# Altium PCB Power.PcbDoc
Units mil, origin at the board's own origin, x right, y up, seen from the top; angles counter-clockwise.
Board outline 1220.47 x 1511.81 mil, 2 copper layers (Top Layer, Bottom Layer), stack 21 mil thick; 58 components, 52 nets, 202 pads, 195 vias.
Unrouted connection lines stored in the file: 46.
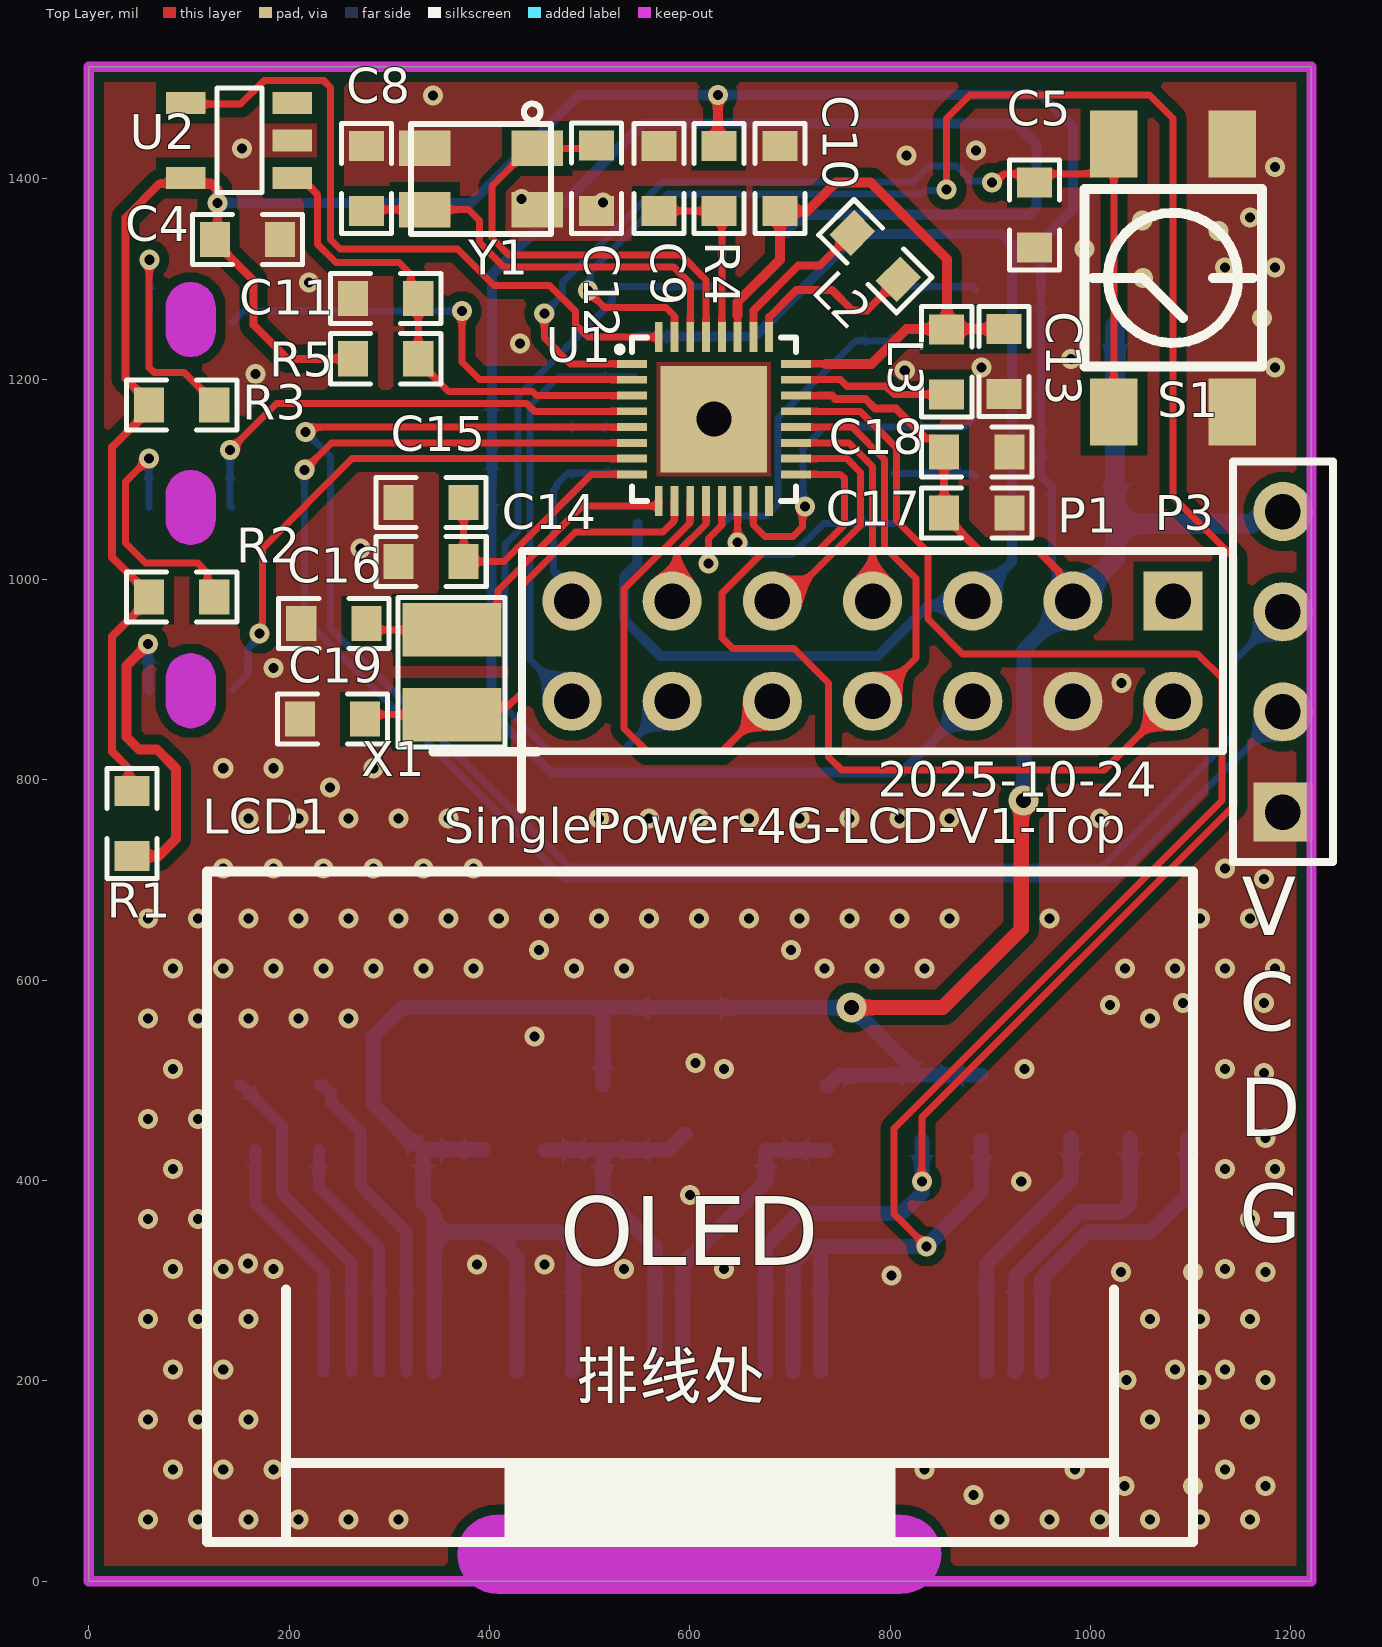
[diagram p0: Top Layer view]
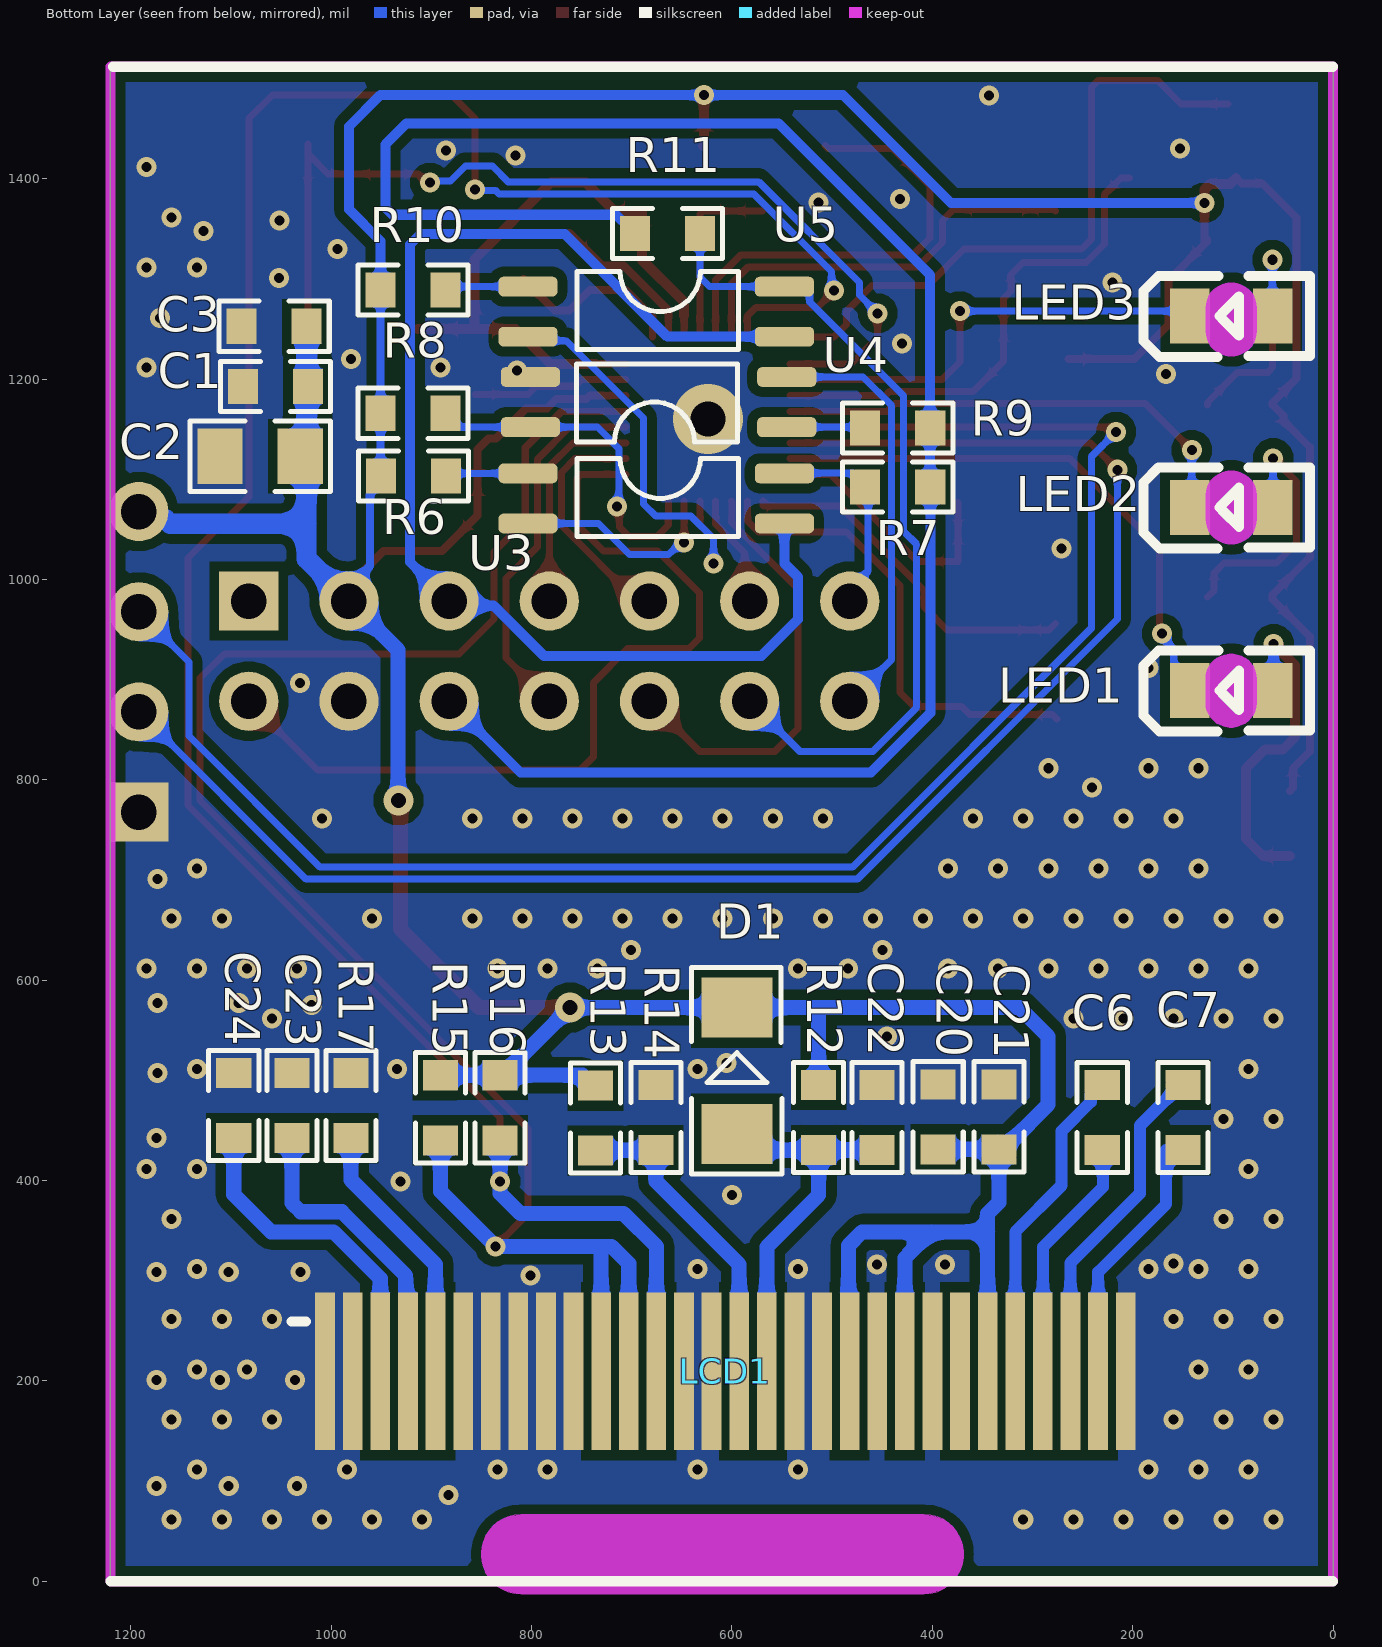
[diagram p1: Bottom Layer view, seen from below]

## Layer stack, top to bottom
Top Solder: solder mask 0.4, Solder Resist, Dk 3.5
Top Layer: signal copper 1.4
Dielectric 2: prepreg 2.8, Composite dielectric, Dk 4.1
Dielectric 1: prepreg 12.6, Composite dielectric, Dk 4.1
Dielectric 3: prepreg 2.8, Composite dielectric, Dk 4.1
Bottom Layer: signal copper 1.4
Bottom Solder: solder mask 0.4, Solder Resist, Dk 3.5

## Board outline
0,0 0,1511.81 1220.47,1511.81 1220.47,0
cut-out: 76.78,877.14 ccw(c101.8,877.14) 126.81,877.14 126.81,900.77 ccw(c101.8,900.77) 76.78,900.77
cut-out: 76.62,1060.16 ccw(c101.63,1060.16) 126.65,1060.16 126.65,1083.79 ccw(c101.63,1083.79) 76.62,1083.79
cut-out: 76.62,1247.71 ccw(c101.63,1247.71) 126.65,1247.71 126.65,1271.34 ccw(c101.63,1271.34) 76.62,1271.34
cut-out: 408,-12.39 cw(c408,27) 408,66.39 811,66.39 cw(c811,27) 850.39,27 cw(c811,27) 811,-12.39

## Design rules (kind name [scope] priority, off if disabled: settings)
Clearance "Via to pad" [IsVia vs IsPad] p1: gap=10 ignorepadtopadclearanceinfootprint=FALSE
Clearance Ploy [InPoly] p2: gap=10 ignorepadtopadclearanceinfootprint=FALSE
Clearance "Track to pad" [IsTrack vs IsPad] p3: gap=8 ignorepadtopadclearanceinfootprint=FALSE
Clearance "Track to track" [IsTrack vs IsTrack] p4: gap=5 ignorepadtopadclearanceinfootprint=FALSE
Clearance "Via to Track" [IsVia vs IsTrack] p5: gap=10 ignorepadtopadclearanceinfootprint=FALSE
Clearance "Via To Via" [IsVia vs IsVia] p6: gap=10 ignorepadtopadclearanceinfootprint=FALSE
ComponentClearance [All] p1: gap=0 collisioncheckmode=3 verticalgap=0 showdistances=FALSE
DiffPairsRouting [All] p1: maxlimit=10 minlimit=7 mostfreqgap=7 toplayer_minwidth=5 toplayer_maxwidth=100 toplayer_prefwidth=7 bottomlayer_minwidth=5 bottomlayer_maxwidth=100 bottomlayer_prefwidth=7 maxuncoupledlength=500
HoleSize [All] p1: absolutevalues=TRUE maxlimit=200 minlimit=1 maxpercent=80.000 minpercent=20.000
HoleToHoleClearance [All] p1: gap=5 allowstackedmicrovias=TRUE
MinimumSolderMaskSliver [All] p1: minsoldermaskwidth=0
PolygonConnect [All vs (InPadClass('All Pads'))] p1: connectstyle=Direct reliefconductorwidth=10 reliefentries=4 polygonreliefangle="90 Angle" airgapwidth=10
PolygonConnect GND焊盘 [InNet('GND_1') vs (InPadClass('All Pads'))] p2: connectstyle=Relief reliefconductorwidth=10 reliefentries=4 polygonreliefangle="90 Angle" airgapwidth=10
PolygonConnect GND过孔 [All vs IsVia] p3: connectstyle=Direct reliefconductorwidth=10 reliefentries=4 polygonreliefangle="90 Angle" airgapwidth=10
RoutingVias RoutingVias_1 [InNet('AGND_1')] p1: holewidth=10 width=20 viastyle="Through Hole" minholewidth=10 minwidth=20 maxholewidth=28 maxwidth=50
RoutingVias [All] p2: holewidth=10 width=20 viastyle="Through Hole" minholewidth=10 minwidth=20 maxholewidth=28 maxwidth=50
SilkToSilkClearance [All] p1: silktosilkclearance=0
SilkToSolderMaskClearance [IsPad] p1: minsilkscreentomaskgap=0 clearancetoexposedcopper=TRUE
SolderMaskExpansion [All] p1: expansion=1 istentingtop=FALSE
Width [All] p1: maxlimit=300 minlimit=5 preferedwidth=7 minimp=50.000000 maximp=50.000000 favimp=50.000000
23 further rules are at their usual default settings.

## Classes and differential pairs
component class OLED0.96: C6 C7 C20 C21 C22 C23 C24 D1 LCD1 R12 R13 R14 R15 R16 R17
component class MCU: C4 C5 C8 C9 C10 C11 C12 C13 C14 C15 C16 C17 C18 C19 L2 L3 LED1 LED2 LED3 P3 R1 R2 R3 R4 R5 R6 R7 R8 R9 R10 R11 S1 U1 U2 U3 U4 U5 X1 Y1
component class 连接: C1 C2 C3 P1

## Components (designator, comment, footprint, x,y, rotation, side; value= is the part's Value field where it differs from the comment)
C1 "10uF/25V" 0603R 1088.31,1192.73 r180 bottom
C2 "22uF/10V" 0805R 1031,1123 r0 bottom
C3 "104/10V" 0603R 1089.52,1252.76 r180 bottom
C4 "104" 0603R 190.88,1339.56 r180 top
C5 "104" 0603R 944.01,1396.2 r270 top
C6 "1uF/10V" 0603R 230.37,495.41 r270 bottom
C7 "1uF/10V" 0603R 149.75,495.41 r270 bottom
C8 "12pF" 0603r 277.11,1432.82 r270 top
C9 "1uF/10V" 0603R 569.33,1432.82 r270 top
C10 "1uF/10V" 0603R 689.97,1432.82 r270 top
C11 "1uF/10V" 0603R 263.93,1280.48 r0 top
C12 "12pF" 0603r 506.95,1368.03 r90 top
C13 "1uF/10V" 0603R 913.55,1185.13 r90 top
C14 "2.2uF/10V" 0603R 309.29,1017.94 r0 top
C15 "104/10V" 0603R 309.29,1076.85 r0 top
C16 "10pF" 0603r 277.11,956.05 r180 top
C17 "104/10V" 0603R 918.94,1066.36 r180 top
C18 "10uF/10V" 0603R 918.94,1127.15 r180 top
C19 "10pF" 0603r 210.76,860.64 r0 top
C20 "1uF/10V" 0603R 394.14,496.09 r270 bottom
C21 "1uF/10V" 0603R 333.62,496.09 r270 bottom
C22 "4.7uF/10V" 0603R 455.44,495.41 r270 bottom
C23 "4.7uF/10V" 0603R 1039.36,442.38 r90 bottom
C24 "2.2uF/10V" 0603R 1097.35,442.38 r90 bottom
D1 "1N4148" 1206D 595.19,509.64 r90 bottom
L2 "1.3nH" 0603R 762.17,1345.73 r315 top
L3 "4.7uH" 0603R 856.44,1184.74 r90 top
LCD1 "SSD1315" "OLED0.96 丝印" 118.11,708.66 r0 top locked
LED1 "LED" LED0805 101.63,889.26 r180 bottom
LED2 "LED" LED0805 101.63,1071.98 r180 bottom
LED3 "LED" LED0805 101.63,1263.03 r180 bottom
P1 "Header 7X2" HDR2X7 1082.37,978.48 r180 top locked
P3 "Header 4" HDR1X4 1192.1,767.8 r90 top
R1 "Res2" 0603R 43,789 r270 top value=1K
R2 "Res2" 0603R 60.25,982.55 r0 top value=1K
R3 "Res2" 0603R 60.25,1174.31 r0 top value=1K
R4 "0R/5%" 0603R 628.95,1432.82 r270 top
R5 "10K/5%" 0603R 263.93,1220.31 r0 top
R6 "471" 0603R 950.43,1103.22 r180 bottom
R7 "102" 0603R 467.07,1092.29 r180 bottom
R8 "102" 0603R 885.78,1165.95 r0 bottom
R9 "471" 0603R 402.07,1151.38 r0 bottom
R10 "471" 0603R 950.78,1288.83 r180 bottom
R11 "102" 0603R 631.97,1345.32 r0 bottom
R12 "4.7K/5%" 0603R 513.48,495.41 r270 bottom
R13 "4.7K/5%" 0603R 736.22,494.84 r270 bottom
R14 "4.7K/5%" 0603R 675.96,430.41 r90 bottom
R15 "4.7K/5%" 0603R 891.07,440.12 r90 bottom
R16 "4.7K/5%" 0603R 831.55,440.12 r90 bottom
R17 "620K/5%" 0603R 980.44,507.38 r270 bottom
S1 "SW2" 4.5*4.5贴片4脚独立按键 1082.37,1301 r270 top
U1 "N32WB031KEQ6-2" "QFN32 4X4" 624.1,1160.01 r0 top
U2 "CAT823ZTDI-GT3" SOT-23-5 202.99,1400.78 r90 top
U3 "EL3H7" EL3H7 803.63,1105.88 r180 bottom
U4 "EL3H7" EL3H7 545.36,1152.13 r0 bottom
U5 "EL3H7" EL3H7 803.62,1292.38 r180 bottom
X1 "32.768K/7pF" Y3215 362.62,907.41 r90 top
Y1 "32MHZ/8PF" 3225 391.52,1399.74 r0 top

## Footprints (in the part's own frame and the unit in brackets; to place one, negate y for a bottom-side part, rotate by r counter-clockwise, add the part's x,y. Pads: shape width x height; smd on the part's side, far side on the other; paste and mask are expansions set on the pad)
4.5*4.5贴片4脚独立按键 [mm]
  rect 1.7x1.2 smd: 1(-3.4,-1.5) 1(3.4,-1.5) 2(-3.4,1.5) 2(3.4,1.5)
  silkscreen extent -2.25,-2.25 2.25,2.25
0603R [mil]
  rect 30x35 smd: 1(0,0) 2(65,0)
  silkscreen extent -23,-25 88,25
0603r [mil]
  rect 30x35 smd: 1(0,0) 2(65,0)
  silkscreen extent -23,-25 88,25
0805R [mil]
  rect 45x55 smd: 1(0,0) 2(80,0)
  silkscreen extent -30,-35 110,35
1206D [mm]
  rect 1.524x1.8 smd: 1(1.6,0) 2(-1.6,0)
  silkscreen extent -2.62,-1.14 2.62,1.14
3225 [mm]
  rect 1.3x0.9 smd: 1(1.425,0.775) 2(-1.425,0.775) 3(-1.425,-0.775) 4(1.425,-0.775)
  silkscreen extent -1.78,-1.4 1.78,1.91, body extent -1.65,-1.3 1.55,1.2, height 0.61
EL3H7 [mm]
  rrect50% 1.5x0.5 smd: 1(0,0) 2(0,-1.27) 3(6.5,-1.27) 4(6.5,0)
  silkscreen extent 1.24,-1.6 5.33,0.38
HDR1X4 [mm] "Connector; Header; 4 Position"
  rect 1.5x1.5 hole 0.9: 1(0,0)
  round 1.5 hole 0.9: 2(2.54,0) 3(5.08,0) 4(7.62,0)
  silkscreen extent -1.27,-1.27 8.89,1.27
HDR2X7 [mm] "Connector; Header; 7x2 Position"
  rect 1.5x1.5 hole 0.9: 1(0,0)
  round 1.5 hole 0.9: 2(0,2.54) 3(2.54,0) 4(2.54,2.54) 5(5.08,0) 6(5.08,2.54) 7(7.62,0) 8(7.62,2.54) 9(10.16,0) 10(10.16,2.54) 11(12.7,0) 12(12.7,2.54) 13(15.24,0) 14(15.24,2.54)
  silkscreen extent -1.27,-1.27 16.51,3.81
LED0805 [mm]
  rect 1x1.4 smd: 1(1.05,0) 2(-1.05,0)
  silkscreen extent -2.22,-1.04 1.99,1.01
"OLED0.96 丝印" [mm]
  rect 0.5x4 smd far side: 1(2.258,-12.678) 2(2.957,-12.678) 3(3.657,-12.678) 4(4.357,-12.678) 5(5.057,-12.678) 6(5.757,-12.678) 7(6.457,-12.678) 8(7.157,-12.678) 9(7.857,-12.678) 10(8.557,-12.678) 11(9.257,-12.678) 12(9.957,-12.678) 13(10.657,-12.678) 14(11.357,-12.678) 15(12.057,-12.678) 16(12.757,-12.678) 17(13.457,-12.678) 18(14.157,-12.678) 19(14.857,-12.678) 20(15.557,-12.678) 21(16.257,-12.678) 22(16.957,-12.678) 23(17.657,-12.678) 24(18.357,-12.678) 25(19.057,-12.678) 26(19.757,-12.678) 27(20.457,-12.678) 28(21.157,-12.678) 29(21.857,-12.678) 30(22.557,-12.678)
  silkscreen extent 0,-17 25,0
"QFN32 4X4" [mm]
  rect 0.76x0.2 smd paste-100 mask+0.051: 1(-2.08,1.4) 2(-2.08,1) 3(-2.08,0.6) 4(-2.08,0.2) 5(-2.08,-0.2) 6(-2.08,-0.6) 7(-2.08,-1) 8(-2.08,-1.4) 17(2.08,-1.4) 18(2.08,-1) 19(2.08,-0.6) 20(2.08,-0.2) 21(2.08,0.2) 22(2.08,0.6) 23(2.08,1) 24(2.08,1.4)
  rect 0.2x0.76 smd paste-100 mask+0.051: 9(-1.4,-2.08) 10(-1,-2.08) 11(-0.6,-2.08) 12(-0.2,-2.08) 13(0.2,-2.08) 14(0.6,-2.08) 15(1,-2.08) 16(1.4,-2.08) 25(1.4,2.08) 26(1,2.08) 27(0.6,2.08) 28(0.2,2.08) 29(-0.2,2.08) 30(-0.6,2.08) 31(-1,2.08) 32(-1.4,2.08)
  rect 2.7x2.7 smd paste-100 mask+0.051: 33(0,0)
  silkscreen extent -2.46,-2.08 2.08,2.08
SOT-23-5 [mm]
  rect 0.55x1 smd: 1(0,0) 2(0.95,0) 3(1.9,0) 4(1.9,2.7) 5(0,2.7)
  silkscreen extent -0.37,0.76 2.29,1.91
Y3215 [mm]
  rect 1.35x2.5 smd: 1(-1.075,0) 2(1.075,0)
  silkscreen extent -1.9,-1.35 1.9,1.37

## Part data
C1 C4 C5 C6 C7 C8 C12 C16 C19 C20 C21 C22 C23 C24: library part CAP
C2: library part "Cap Pol1", "Polarized Capacitor (Radial)", LatestRevisionDate=17-Jul-2002, LatestRevisionNote="Re-released for DXP Platform.", PackageDescription="Polarized Capacitor (Radial); 2 Leads", PackageReference=RB7.6-15, Published=8-Jun-2000, Publisher="Altium Limited"
C3 C9 C10 C11 C13 C14 C15 C17 C18: library part CAP_1
D1: library part DIODE
L2 L3: library part Inductor, "Inductor", Code_IEC=1005, Code_JEITA=0402, LatestRevisionDate=29-May-2009, LatestRevisionNote="IPC-7351 Footprint Added.", PackageDescription="Chip Inductor", PackageReference=0402-A, Published=8-Jun-2000, Publisher="Altium Limited"
P1: "Header, 7-Pin, Dual row", LatestRevisionDate=17-Jul-2002, LatestRevisionNote="Re-released for DXP Platform.", Publisher="Altium Limited"
P3: "Header, 4-Pin", LatestRevisionDate=17-Jul-2002, LatestRevisionNote="Re-released for DXP Platform.", Publisher="Altium Limited"
R4 R5 R6 R7 R8 R9 R10 R11 R12 R13 R14 R15 R16 R17: library part RES
U1: JLCPCB Part Class="Extended Part", Manufacturer=Nations(国民技术), Add into BOM=yes, Convert to PCB=yes, Device=N32WB031KEQ6-2, LCSC Part Name=N32WB031KEQ6-2, Manufacturer Part=N32WB031KEQ6-2, Supplier=LCSC, Supplier Footprint=QFN-32, Supplier Part=C2981446, Symbol=N32WB031KEQ6-2
U2: library part CAT823
U3 U4 U5: library part Optical_Coupler_1
X1: library part XTAL
Y1: library part 12MHz无源
R1 R2 R3: LatestRevisionDate=17-Jul-2002, LatestRevisionNote="Re-released for DXP Platform.", PackageDescription="Axial Device, Thru-Hole; 2 Leads; 0.4 in Pin Spacing", PackageReference=AXIAL-0.4, Published=8-Jun-2000, Publisher="Altium Limited"

## Via types
v1: diameter 20, hole 10, Top Layer to Bottom Layer, 192 vias
v2: diameter 30, hole 15, Top Layer to Bottom Layer, 2 vias
v3: diameter 70, hole 35, Top Layer to Bottom Layer, 1 vias

## Nets (pads, with @x,y where several pads share a name; then routed paths per layer and width w, separated by ;. In a path a pad name is that pad's centre, name@x,y a point inside that pad or via, vN(x,y) a via of type N, cw(c..) or ccw(c..) an arc to the next point about the centre after c; other vN are vias at no path point)
4G_MCU_RXD: P1.8 U1.20 | length 374.1
  Top Layer w7: U1.20 762.12,1152.14 794.37,1119.89 794.37,1032.41 825.68,1001.1 825.68,921.79 P1.8
4G_MCU_TXD: P1.7 U1.19 | length 220.5
  Top Layer w7: U1.19 758.87,1136.39 782.37,1112.88 P1.7
4G_Reset: P1.9 U1.18 | length 242.4
  Top Layer w7: P1.9 695.11,978.48 770.37,1053.73 770.37,1106.88 756.61,1120.64 U1.18
BL0942_Control: P1.12 R11.1 U5.4 | length 823.1
  Bottom Layer w7: P1.12 532.37,828.48 459.32,828.48 415.62,872.18 415.62,1035.13 428.57,1048.08 428.57,1183.21 522.57,1277.2 522.57,1286.15 528.8,1292.38 622.25,1292.38 631.97,1302.1 R11.1
BL0942_RXD: P1.13 R7.1 U3.4 | length 210.2
  Bottom Layer w7: P1.13 482.37,990.26 464.02,1008.61 464.02,1089.24 R7.1 467.07,1094.68 478.57,1106.18 U3.4@547.42,1106.18
BL0942_TXD: P1.14 U4.2 | length 429.1
  Bottom Layer w7: P1.14 440.57,920.27 440.57,1173.64 469.06,1202.13 U4.2
Dog_WDI: U1.32 U2.4 | length 676.9
  Top Layer w7: U2.4@104.81,1474.55 151.63,1474.55 175.39,1498.31 234.12,1498.31 241.34,1491.09 241.34,1339.36 250.88,1329.82 368.27,1329.82 404.61,1293.48 460.11,1293.48 485.85,1267.74 485.85,1254.5 498.46,1241.9 U1.32
GND: C1.1 C2.2 C3.1 C4.1 C5.2 C8.1 C9.1 C10.1 C11.1 C12.1 C13.1 C14.1 C15.1 C16.2 C17.1 C18.1 C19.1 C20.1 C21.1 C22.1 C23.2 C24.2 LCD1.1 LCD1.8 LCD1.10 LCD1.12 LCD1.13 LCD1.16 LCD1.17 LCD1.21 LCD1.22 LCD1.23 LCD1.24 LCD1.25 LCD1.29 LCD1.30 P1.4 P3.1 R14.2 R17.1 S1.2 U1.33 U2.2 U4.3 Y1.2 Y1.4
  other v1: 59.27,61.56 109.27,61.56 159.27,61.56 209.27,61.56 259.27,61.56 309.27,61.56 909.27,61.56 959.27,61.56 1009.27,61.56 1059.27,61.56 1109.27,61.56 1159.27,61.56 883,86 1034,95 1102.36,95 1174.48,95 84.27,111.56 134.27,111.56 184.27,111.56 534.27,111.56 634.27,111.56 784.27,111.56 834.27,111.56 984.27,111.56 1134.27,111.56 59.27,161.56 109.27,161.56 159.27,161.56 1059.27,161.56 1109.27,161.56 1159.27,161.56 1036,201 1111,201 1174.48,201 84.27,211.56 134.27,211.56 1084.27,211.56 1134.27,211.56 59.27,261.56 109.27,261.56 159.27,261.56 1059.27,261.56 1109.27,261.56 1159.27,261.56 801.27,305.14 1030.58,308.55 1102.36,308.55 1174.48,308.55 84.27,311.56 134.27,311.56 184.27,311.56 534.27,311.56 634.27,311.56 1134.27,311.56 387.38,316.19 455.02,316.11 159.17,317.06 59.27,361.56 109.27,361.56 1159.27,361.56 600.17,385.52 930.85,399.26 84.27,411.56 1134.27,411.56 1184.27,411.56 1174.48,442.38 59.27,461.56 109.27,461.56 1173.31,507.38 84.27,511.56 634.27,511.56 934.27,511.56 1134.27,511.56 605.48,517.34 445.18,543.94 59.27,561.56 109.27,561.56 159.27,561.56 209.27,561.56 259.27,561.56 1059.27,561.56 1019.5,575.13 1092.37,577.05 1173.31,577.05 84.27,611.56 134.27,611.56 184.27,611.56 234.27,611.56 284.27,611.56 334.27,611.56 384.27,611.56 484.27,611.56 534.27,611.56 734.27,611.56 784.27,611.56 834.27,611.56 1034.27,611.56 1084.27,611.56 1134.27,611.56 1184.27,611.56 449.57,629.9 700.96,629.9 59.27,661.56 109.27,661.56 159.27,661.56 209.27,661.56 259.27,661.56 309.27,661.56 359.27,661.56 409.27,661.56 459.27,661.56 509.27,661.56 559.27,661.56 609.27,661.56 659.27,661.56 709.27,661.56 759.27,661.56 809.27,661.56 859.27,661.56 959.27,661.56 1109.27,661.56 1159.27,661.56 1173.31,700.78 134.27,711.56 184.27,711.56 234.27,711.56 284.27,711.56 334.27,711.56 384.27,711.56 1134.27,711.56 159.27,761.56 209.27,761.56 259.27,761.56 309.27,761.56 359.27,761.56 509.27,761.56 559.27,761.56 609.27,761.56 659.27,761.56 709.27,761.56 759.27,761.56 809.27,761.56 859.27,761.56 1009.27,761.56 240.74,792.23 134.27,811.56 184.27,811.56 284.27,811.56 1031,896.83 184.27,911.56 271.05,1031.05 166.68,1205.17 814.55,1208.79 891.07,1211.55 1184.27,1211.56 980.44,1220.31 430.44,1235.62 1170.95,1261 220,1296.35 1052.37,1301 1134.27,1311.56 1184.27,1311.56 993.78,1329.82 1127.64,1347.64 1051.64,1358.28 1159.27,1361.56 513.48,1376.45 432.2,1379.95 1184.27,1411.56 816.23,1423.05 885.52,1428.05 152.98,1430.25 343.56,1483.25
  other v3: 624.1,1160.01
GND_G: P1.5 U3.3 U5.3 | length 1279.7
  Bottom Layer w10: U3.3 547.72,1016.16 534.24,1002.68 534.24,960.02 570.45,923.81 787.84,923.81 837.84,973.81 877.7,973.81 P1.5 921.44,1017.55 921.44,1334.36 911.05,1344.76 766.92,1344.76 664.54,1242.38 593.02,1242.38 U5.3
Key_button: C5.1 S1.1 U1.1 | length 1046
  Top Layer w7: v1(454.7,1265.65) 454.7,1241.48 481.06,1215.13 U1.1 ; v1(901.44,1396.2) 904.96,1396.2 913.65,1404.9 1003.19,1404.9 S1.1@1023.31,1425.02 ; S1.1@1023.31,1167.14 S1.1@1023.31,1425.02 ; S1.1@1023.31,1434.86 S1.1@1023.31,1425.02
  Bottom Layer w7: v1(454.7,1265.65) 472.82,1283.78 472.82,1296.5 573.3,1396.98 823.4,1396.98 838.99,1412.58 866.14,1412.58 880.94,1397.77 899.87,1397.77 v1(901.44,1396.2)
LCD_SCL: LCD1.18 R16.1 U1.31 | length 2415
  Top Layer w7: v1(498.19,1288.64) 498.19,1287.98 514.83,1271.34 576.25,1271.34 584.73,1262.86 U1.31 ; v1(831.55,399.26) 831.55,462.9 1143.12,774.47 1143.12,1021.39 1082.37,1082.15 1082.37,1459.99 1058.8,1483.56 879.82,1483.56 856.4,1460.14 v1(856.4,1389.08)
  Bottom Layer w7: v1(498.19,1288.64) 500.68,1291.12 500.68,1307.39 578.27,1384.98 832.4,1384.98 835.9,1388.48 855.81,1388.48 v1(856.4,1389.08)
  Bottom Layer w15: LCD1.18 675.49,334.35 708.19,367.05 811.33,367.05 831.55,387.27 R16.1
LCD_SDA: LCD1.19 LCD1.20 R15.1 U1.21 | length 1834.7
  Top Layer w7: U1.21 769.98,1167.88 806.37,1131.49 806.37,1058.68 837.68,1027.36 837.68,960.49 872.38,925.79 1106.81,925.79 1131.12,901.48 1131.12,779.44 803.71,452.04 803.71,366.82 v1(836.18,334.35)
  Bottom Layer w15: LCD1.19 703.05,317.06 720.33,334.35 730.61,334.35 ; LCD1.20 730.61,334.35 ; R15.1 891.07,389.24 v1(836.18,334.35) 730.61,334.35
LED_Alarm: LED2.2 U1.4 | length 481.5
  Top Layer w7: v1(141.02,1129.07) 187.5,1175.56 437.19,1175.56 444.87,1167.88 U1.4
  Bottom Layer w7: v1(141.02,1129.07) 141.02,1073.94 LED2.2
LED_Gate: LED3.2 U1.2 | length 462.1
  Top Layer w7: v1(372.46,1267.92) 372.46,1217.22 390.12,1199.56 460.35,1199.56 460.53,1199.38 U1.2
  Bottom Layer w7: LED3.2@142.98,1256.32 154.58,1267.92 v1(372.46,1267.92)
LED_RUN: LED1.2 U1.7 | length 560.4
  Top Layer w7: v1(170.57,945.95) 173.05,948.44 173.05,956.31 173.3,956.55 173.3,1031.05 262.89,1120.64 U1.7
  Bottom Layer w7: LED1.2 159.17,905.45 159.17,931.04 170.57,942.44 v1(170.57,945.95)
LoseCurrent: P1.2 U1.17 | length 868
  Top Layer w7: U1.17 750.53,1104.89 754.63,1100.78 754.63,1054.96 728.14,1028.48 674.35,1028.48 632.37,986.5 632.37,941.62 642.83,931.16 704.15,931.16 738.48,896.83 738.48,822.98 751.7,809.75 1013.65,809.75 1047.65,843.75 P1.2
MCU_BL0942_Control: U1.13 U5.2 | length 411.4
  Top Layer w7: v1(618.46,1016.02) 618.46,1040.82 631.97,1054.33 U1.13
  Bottom Layer w7: v1(618.46,1016.02) 618.46,1040.82 640.8,1063.16 676.03,1063.16 688.21,1075.34 688.21,1161.12 765.25,1238.16 799.4,1238.16 U5.2
MCU_RESET: C11.2 R5.2 U1.3 U2.1 | length 504.6
  Top Layer w7: U2.1 211.85,1400.78 228.13,1384.49 228.13,1334.99 246.74,1316.38 309.62,1316.38 321.63,1304.38 321.63,1287.78 C11.2 R5.2 328.93,1217.81 359.18,1187.56 443,1187.56 446.93,1183.63 U1.3
NetC6_1: C6.1 LCD1.5 | length 323.3
  Bottom Layer w12: C6.1 232.87,495.41 241.87,486.41 241.87,478.55 271.05,449.38 271.05,395.01 317.22,348.85 LCD1.5
NetC6_2: C6.2 LCD1.4 | length 245.1
  Bottom Layer w12: C6.2@229.81,429.85 229.81,393.34 289.66,333.49 LCD1.4
NetC7_1: C7.1 LCD1.3 | length 333.9
  Bottom Layer w12: C7.1 152.25,495.41 192.73,454.93 192.73,387.27 262.1,317.9 LCD1.3
NetC7_2: C7.2 LCD1.2 | length 249.1
  Bottom Layer w12: C7.2@166.68,430.56 166.68,376.41 234.54,308.55 LCD1.2
NetC9_2: C9.2 R4.2 U1.28 | length 186.8
  Top Layer w7: C9.2 R4.2 631.97,1364.8 U1.28
NetC10_2: C10.2 C13.2 L3.2 U1.24 U1.27 | length 645.5
  Top Layer w7: U1.27 647.72,1263.43 ; U1.24 736.07,1215.13
  Top Layer w10: 647.72,1263.43 647.72,1276.9 689.97,1319.15 C10.2 717.55,1367.82 745.93,1396.2 780.56,1396.2 856.81,1319.96 L3.2@856.81,1250.11 ; 736.07,1215.13 781.23,1215.13 816.23,1250.13 853.73,1250.13 C13.2
NetC14_2: C14.2 C15.2 U1.8 | length 262.9
  Top Layer w7: C15.2 C14.2 414.67,1017.94 501.62,1104.89 U1.8
NetC22_2: C22.2 D1.2 LCD1.14 R12.2 | length 388.8
  Bottom Layer w15: C22.2 R12.2 ; LCD1.14 565.25,333.75 513.48,385.52 R12.2 ; D1.2 578.95,430.41 R12.2
NetC23_1: C23.1 LCD1.27 | length 304.9
  Bottom Layer w15: LCD1.27 925.74,211.74 925.74,305.14 989.44,368.85 1030.58,368.85 1039.36,377.63 C23.1
NetC24_1: C24.1 LCD1.28 | length 330
  Bottom Layer w15: LCD1.28 951.08,302.2 997.73,348.85 1060.16,348.85 1097.35,386.03 C24.1
NetL2_1: L2.1 U1.26 | length 157.4
  Top Layer w7: U1.26 663.47,1261.55
  Top Layer w8: 663.47,1261.55 663.47,1268.62 708.19,1313.34 729.77,1313.34 L2.1
NetL2_2: L2.2 U1.25 | length 181.4
  Top Layer w7: U1.25 679.22,1261.84
  Top Layer w8: 679.22,1261.84 706.32,1288.95 741.9,1288.95 762.17,1268.68 777.04,1268.68 L2.2
NetL3_1: L3.1 U1.23 | length 156.5
  Top Layer w7: U1.23 750.35,1199.38 756.85,1192.88 795.58,1192.88 803.71,1184.74 L3.1
NetLCD1_15: LCD1.15 R13.2 R14.1 | length 315.8
  Bottom Layer w15: LCD1.15 592.81,316.11 675.96,399.26 R14.1 676.25,430.12 735.93,430.12 R13.2
NetLCD1_26: LCD1.26 R17.2 | length 267.9
  Bottom Layer w15: LCD1.26 895.96,316.19 980.44,400.67 R17.2
NetLED1_1: LED1.1 R1.2 | length 332
  Top Layer w10: R1.2 69.95,724 86.94,740.99 86.94,811.5 68.13,830.31 50.08,830.31 37.75,842.63 37.75,913.9 v1(59.33,935.48)
  Bottom Layer w10: v1(59.33,935.48) 59.33,890.21 LED1.1
NetLED2_1: LED2.1 R2.2 | length 264.4
  Top Layer w7: v1(59.91,1120.88) 36.53,1097.51 36.53,1036.34 56.61,1016.26 108.83,1016.26 118.64,1006.45 118.64,989.16 R2.2
  Bottom Layer w7: v1(59.91,1120.88) 59.91,1072.35 LED2.1
NetLED3_1: LED3.1 R3.2 | length 245.8
  Top Layer w7: v1(60.53,1319.15) 60.28,1318.9 60.28,1211.55 64.99,1206.84 95.22,1206.84 125.25,1176.81 R3.2
  Bottom Layer w7: LED3.1 60.53,1263.28 v1(60.53,1319.15)
NetR6_2: R6.2 U3.1 | length 82.9
  Bottom Layer w7: U3.1 882.76,1105.88 R6.2
NetR9_2: R9.2 U4.1 | length 78.6
  Bottom Layer w7: R9.2 467.83,1152.13 U4.1
NetR10_2: R10.2 U5.1 | length 83.6
  Bottom Layer w7: U5.1 882.23,1292.38 R10.2
Relay_C_A: P1.11 U1.12 | length 113.7
  Top Layer w7: P1.11 587.35,983.46 587.35,1026.68 616.23,1055.56 U1.12
Relay_C_B: P1.10 U1.11 | length 432.5
  Top Layer w7: U1.11 600.17,1077.8 600.17,1056.47 534.24,990.55 534.24,851.31 557.07,828.48 632.37,828.48 P1.10
SWCLK: P3.3 U1.5 | length 1732.6
  Top Layer w7: v1(216.48,1147.39) 220,1147.39 224.74,1152.14 U1.5
  Bottom Layer w7: v1(216.48,1147.39) 241.34,1122.53 241.34,951.31 479.88,712.78 1011.12,712.78 1142.1,843.75 1142.1,917.8 P3.3
SWDIO: P3.2 U1.6 | length 1640.8
  Top Layer w7: v1(215.25,1109.51) 242.12,1136.39 U1.6
  Bottom Layer w7: v1(215.25,1109.51) 215.25,960.44 474.91,700.78 1025.07,700.78 P3.2
USART1_TXD: U1.16
USART2_RXD: R8.1 U1.15 U4.4 | length 350.3
  Top Layer w7: U1.15 663.47,1054.36 674.95,1042.88 702.84,1042.88 712.41,1052.45 712.41,1070.41 v1(714.9,1072.9)
  Bottom Layer w7: v1(714.9,1072.9) 712.98,1074.81 712.98,1130.77 734.34,1152.13 U4.4 874.28,1152.13 885.78,1163.63 R8.1
USART2_TXD: U1.14 U3.2 | length 215
  Top Layer w7: v1(647.74,1036.86) U1.14@647.73,1078.11
  Bottom Layer w7: v1(647.74,1036.86) 651.25,1036.86 663.32,1024.8 702.16,1024.8 733.25,1055.88 U3.2
VCC33: C1.2 C2.1 C3.2 C4.2 C17.2 C18.2 C20.2 C21.2 D1.1 LCD1.6 LCD1.9 LCD1.11 P1.3 P3.4 R1.1 R2.1 R3.1 R4.1 R5.1 R6.1 R8.2 R10.1 R12.1 R13.1 R15.2 R16.2 U1.22 U2.5 | length 5571.7
  Top Layer w7: U1.22 728.58,1183.63
  Top Layer w8: R1.1 39.9,792.1 39.9,811.5 23.18,828.22 23.18,942.98 60.25,980.05 R2.1 60.25,985.05 23.18,1022.12 23.18,1132 49.25,1158.07 49.25,1163.31 R3.1 60.25,1176.81 36.53,1200.53 36.53,1361.14 70.69,1395.3 91.21,1395.3 U2.5 ; C4.2 125.88,1337.06 C4.2@128.51,1334.43 ; 128.51,1362.73 C4.2@128.51,1334.43 ; R5.1 198.33,1220.31 164.4,1254.24 164.4,1298.54 C4.2@128.51,1334.43 ; 728.58,1183.63 741.9,1183.63 745.15,1180.38 775.15,1180.38 784.87,1170.66 805.6,1170.66 835.61,1140.65 842.94,1140.65 853.94,1129.65 C18.2 C17.2 853.94,1063.86 889.32,1028.48 947.9,1028.48 968.77,1007.61 968.77,1005.89 982.37,992.29 P1.3
  Top Layer w10: U2.5 102.52,1394.95 122.65,1394.95 128.51,1389.09 v1(128.51,1375.91) 128.51,1362.73 ; v1(628.04,1483.56) 628.04,1433.74 R4.1
  Top Layer w15: v2(761.54,572.63) 852.56,572.63 930.85,650.92 930.85,777.36 v2(932.93,779.44)
  Bottom Layer w8: R10.1 950.78,1103.56 R6.1 961.43,1092.22 961.43,1013.23 982.37,992.29 P1.3
  Bottom Layer w10: v1(128.51,1375.91) 381.47,1375.91 489.12,1483.56 v1(628.04,1483.56) 951.03,1483.56 982.3,1452.29 982.3,1369.49 950.78,1337.97 R10.1
  Bottom Layer w15: LCD1.6 344.78,348.85 ; C20.2 C21.2 ; LCD1.9 427.46,322.48 401.09,348.85 ; LCD1.11 483.78,210.72 483.78,335.15 470.09,348.85 401.09,348.85 ; R12.1 513.48,568.6 509.45,572.63 ; R13.1 738.72,494.84 749,505.12 R16.2@829.05,505.12 ; R15.2 R16.2 R16.2@829.05,505.12 ; v2(932.93,779.44) 933.36,779.87 933.36,929.47 P1.3 ; C21.2 326.12,438.59 321.6,438.59 284.46,475.72 284.46,543.94 313.16,572.63 509.45,572.63 ; C21.2 333.62,378.21 344.78,367.05 344.78,348.85 ; 344.78,348.85 401.09,348.85 ; 509.45,572.63 D1.1 v2(761.54,572.63) R16.2@829.05,505.12
  Bottom Layer w20: P1.3 1024.52,1020.63 1024.52,1055.62 ; C3.2 1024.52,1055.62 ; P3.4 1184.62,1060.32 1165.55,1060.32 1160.85,1055.62 1024.52,1055.62
VCC33_G: P1.6 R7.2 R9.1 R11.2 | length 1911.1
  Bottom Layer w10: R11.2 696.97,1347.82 706.97,1357.82 709.47,1357.82 715.73,1364.08 938.86,1364.08 945.89,1371.11 945.89,1434.38 924.95,1455.32 553.58,1455.32 402.37,1304.11 402.37,1092.58 R7.2 402.07,866.64 461.39,807.32 811.21,807.32 P1.6
XIN_32K: C16.1 U1.9 X1.2 | length 359.7
  Top Layer w7: C16.1 283.43,949.73 X1.2 385.25,949.73 408.33,972.8 408.33,989.13 492.65,1073.45 568.54,1073.45 568.98,1073.89 U1.9
XO32MP_IN: C8.2 U1.30 Y1.3 | length 420.9
  Top Layer w7: C8.2 278.52,1369.23 Y1.3 378.94,1369.23 389.96,1358.21 389.96,1336.3 414.12,1312.14 583.73,1312.14 600.48,1295.39 U1.30
XO32MP_OUT: C12.2 U1.29 Y1.1 | length 461.5
  Top Layer w7: C12.2 504.17,1430.25 Y1.1 439.75,1430.25 402.37,1392.87 402.37,1340.86 419.09,1324.14 591.01,1324.14 616.23,1298.91 U1.29
XOUT_32K: C19.2 U1.10 X1.1 | length 472.8
  Top Layer w7: C19.2 280.2,865.08 X1.1 370.65,873.12 418.23,873.12 432.37,887.26 432.37,993.82 485.85,1047.31 573.33,1047.31 584.42,1058.39 584.42,1077.8 U1.10
pads on no net: LCD1.7 P1.1 U2.3

## Polygon pours and split planes (outlines as drawn)
GND on Top Layer "NONET_L-01_P-001" (solid, remove dead copper, pour order 0): -81,1577 -68,1590 1541,1590 1541,-121 1457,-205 1437,-185 -275,-185 -275,1384 -80,1579
GND on Bottom Layer "NONET_L-01_P-001" (solid, remove dead copper, pour order 1): -106,1600 -82,1624 1623,1624 1623,-83 1488,-218 1437,-167 -240,-167 -240,292 -354,406 -103,657 -103,1599

## Keep-outs
Keep-Out Layer:
  lines w10: 0,0 0,1511.81 570.87,1511.81 649.61,1511.81 1220.47,1511.81 1220.47,0 649.61,0 570.87,0 0,0
  lines w50: 101.63,1060.16 101.63,1083.79 ; 101.63,1247.71 101.63,1271.34 ; 101.8,877.14 101.8,900.77
  lines w78.74: 408,27 811,27

## Silkscreen, mask and mechanical layers (free items; w line width, h text height)
Top Overlay:
  lines w9: 343.56,828.03 447.62,828.03 ; 432.2,771 432.2,865.85
  text "2025-10-24" at 787.84,771.44 h60
  text "SinglePower-4G-LCD-V1-Top" at 354.52,725.19 h60
  text "V" at 1150.78,625.21 h100
  text "C" at 1148.32,530.01 h100
  text "D" at 1148.69,424.88 h100
  text "G" at 1148.37,318.72 h100
Bottom Overlay:
  lines w10: 0,0 1220.47,0 ; 0,1511.81 1218,1511.81

## Text inside footprints (layer, text, board x,y; h text height)
LCD1: Top Overlay "排线处" at 486.42,168.22 h78.74; Top Overlay "OLED" at 470.09,292.92 h118.11